# Allegro board senior design v5.brd
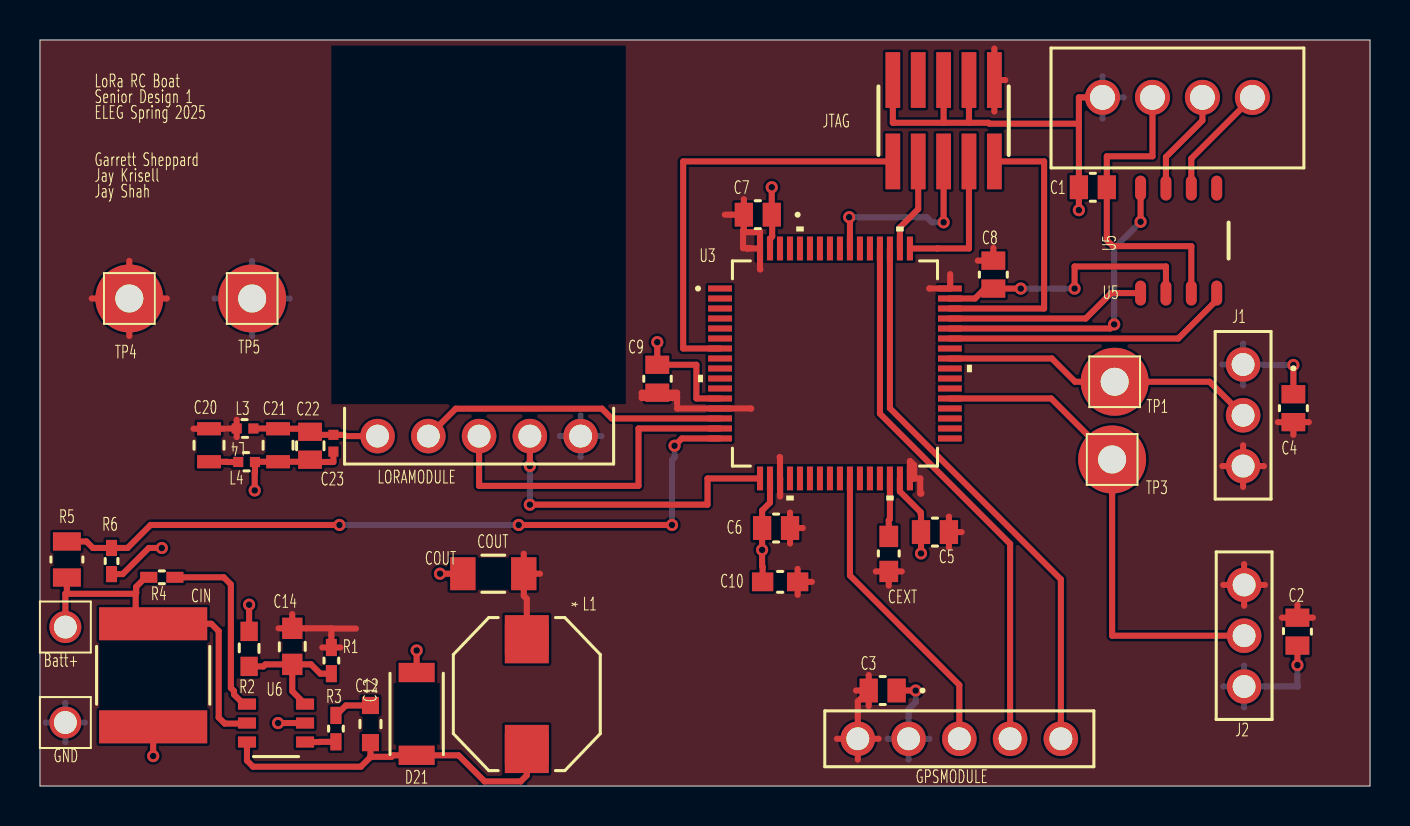
[diagram p0: board, top side]
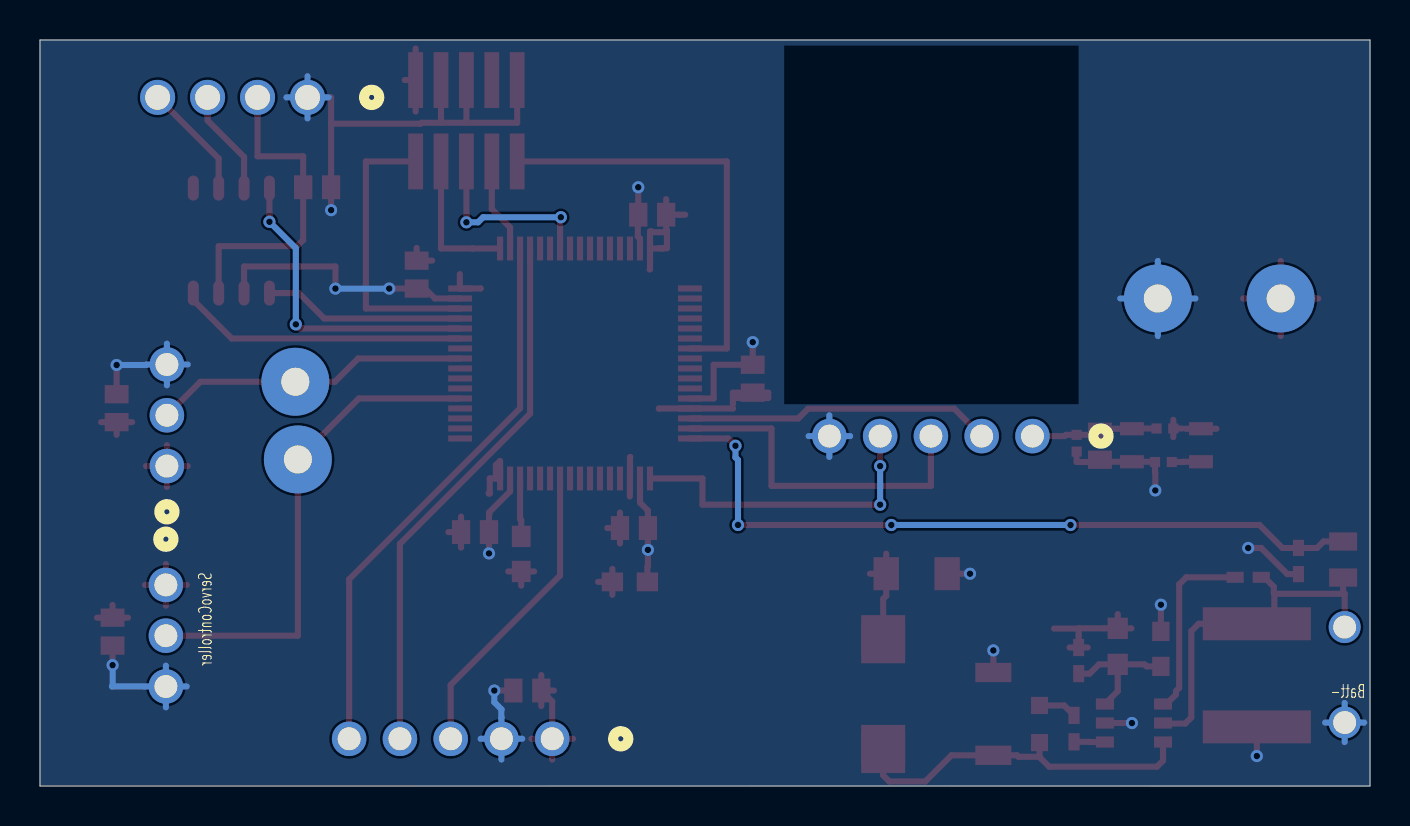
[diagram p1: board, bottom side, seen from below]

Outline 66.55 x 37.31 mm; copper layers: TOP, BOTTOM. Coordinates in mm from the lower left corner of the outline.
Outline path: 0,37.31 0,0 66.55,0 66.55,37.31 0,37.31

## Design rules (mm)
constraint set DEFAULT: min track width 0.305

## Placement (name value [footprint] x y rotation side)
C1  .1uF  [CAP_KGM21_KAV-L]  52.68 29.95 0 top
C2  .1uF  [CAP_KGM21_KAV-L]  62.92 7.72 90 top
C3  .1uF  [CAP_KGM21_KAV-L]  42.16 4.78 180 top
C4  .1uF  [CAP_KGM21_KAV-L]  62.71 18.9 270 top
C5  .1uF  [CAP_KGM21_KAV-L]  44.78 12.7 0 top
C6  .1uF  [CAP_KGM21_KAV-L]  36.83 12.9 0 top
C7  .1uF  [CAP_KGM21_KAV-L]  35.92 28.57 180 top
C8  .1uF  [CAP_KGM21_KAV-L]  47.7 25.58 90 top
C9  .1uF  [CAP_KGM21_KAV-L]  30.89 20.37 270 top
C10  4.7uF  [CAP_0603_CL10A_1P6XP8_SAM-M]  37.03 10.21 0 top
C12  .1uf  [CAP_CL10_SAM-M]  16.54 3.1 90 top
C14  470pF  [CAP_0603G_AVX-M]  12.62 6.99 270 top
C20  10uF  [G-21_MUR-L]  8.46 17.04 90 top
C21  10uF  [G-21_MUR-L]  11.91 17.04 90 top
C22  .1uF  [CAP_KGM21_KAV-L]  13.51 17.02 90 top
C23  47pF  [CAP_GJM1555C1H220JB01__MUR-L]  14.68 17.14 90 top
CANHEADER  CONN_B4B-XH-A  [CONN_B4B-XH-A_JST]  53.16 34.44 180 top
CEXT  4.7 uF  [CAP_0603_CL10A_1P6XP8_SAM-M]  42.47 11.61 270 top
CIN  10uF  [CAP_NTS_55_2P8T_NIP]  5.66 5.54 90 top
COUT  10uf  [G-31_MUR-M]  22.68 10.62 0 top
D21  DIODE_MFLAT  [M-FLAT_TOS-L]  18.85 3.61 270 top
GND  Battery-  [AMV_CON1]  1.27 3.18 0 top
GPSMODULE  CONN5_1LFBN-RC  [CONN5_1LFBN-RC_SUL]  40.92 2.36 0 top
JTAG  FTSH-105-XX-X-DV  [SAMTEC_FTSH-105-XX-X-DV]  45.21 33.27 180 top
L1  4.7uh  [IND_7045_TDK]  24.36 4.6 270 top
L3  INDUCTOR  [IND_BLM15_0402_MUR-L]  10.26 17.88 180 top
L4  INDUCTOR  [IND_BLM15_0402_MUR-L]  10.34 16.21 180 top
LORAMODULE  CONN5_1LFBN-RC  [CONN5_1LFBN-RC_SUL]  16.89 17.5 0 top
R1  15K  [RC0402N_PAN-M]  14.58 6.27 270 top
R2  4.7K  [RC0603N_YAG-M]  10.46 6.86 90 top
R3  51  [RC0402N_YAG-M]  14.81 2.87 270 top
R4  5.1K  [RC0402N_PAN-M]  6.1 10.44 0 top
R5  30K  [RES_R0805_ROM-M]  1.35 11.33 90 top
R6  10K  [RES_1005_SAM-M]  3.58 11.25 90 top
SPEEDCONTROLLER  CONN_PPTC031  [CONN_PPTC031_SUL]  60.2 16 270 top
STEERINGSERVO  CONN_PPTC031  [CONN_PPTC031_SUL]  60.25 10.06 90 top
TP1  TEST POINT  [AMV_TEST_POINT]  53.77 20.22 0 top
TP3  TEST POINT  [AMV_TEST_POINT]  53.64 16.33 0 top
TP4  TEST POINT  [AMV_TEST_POINT]  4.47 24.38 0 top
TP5  TEST POINT  [AMV_TEST_POINT]  10.62 24.38 0 top
U3  STM32F4XXR2  [LQFP64-10X10MM]  39.78 21.13 0 top
U5  TCAN1042H-Q1D  [D0008A_L]  56.97 27.28 90 top
U6  R1240N001x  [SOT-23-6W_PE-SOT23-6W-0512_NMD]  11.81 3.15 0 top
VIN  Battery+  [AMV_CON1]  1.27 7.95 0 top

## Library data of the parts
C1-C10 C14 C20-C23 CEXT COUT = C: User Part Number: PN; Tolerance: TOL
C12 = C
CANHEADER = B4B-XH-A: User Part Number: PN; Tolerance: TOL
CIN = KTS500B106M55N0T00: User Part Number: PN; Tolerance: TOL
D21 = CMS06TE12L,Q,M: User Part Number: PN; Tolerance: TOL
GND VIN = CON1
GPSMODULE LORAMODULE = PPTC051LFBN-RC: User Part Number: PN; Tolerance: TOL
JTAG = FTSH-105-XX-X-DV
L1 = SLF7045T-4R7M2R0-PF: User Part Number: PN; Tolerance: TOL
L3 L4 = INDUCTOR: User Part Number: PN; Tolerance: TOL
R1-R6 = R: User Part Number: PN; Tolerance: TOL
SPEEDCONTROLLER STEERINGSERVO = PPTC031LFBN-RC: User Part Number: PN; Tolerance: TOL
TP1 TP3-TP5 = TEST POINT
U3 = STM32F446RET6TR: User Part Number: PN; Tolerance: TOL
U5 = TCAN1042HDRQ1: Tolerance: TOL; User Part Number: PN
U6 = R1240N001B-TR-FE_3: User Part Number: PN; Tolerance: TOL

## Footprints (pads in the part's own frame, mm; a bottom-side part is the same pattern mirrored in y, then rotated)
AMV_CON1
  round 1.6 hole 1.143: 1(0,0)
AMV_TEST_POINT
  round 3.4 hole 1.4: 1(0,0)
CAP_0603_CL10A_1P6XP8_SAM-M
  rect 1.067x0.94 smd: 1(-0.876,0) 2(0.876,0)
CAP_0603G_AVX-M
  rect 1.067x1.016 smd: 1(-0.902,0) 2(0.902,0)
CAP_CL10_SAM-M
  rect 0.859x0.851 smd: 1(-0.929,0) 2(0.929,0)
CAP_GJM1555C1H220JB01__MUR-L
  rect 0.508x0.508 smd: 1(-0.419,0) 2(0.419,0)
CAP_KGM21_KAV-L
  rect 0.914x1.194 smd: 1(-0.699,0) 2(0.699,0)
CAP_NTS_55_2P8T_NIP
  rect 1.651x5.41 smd: 1(-2.578,0) 2(2.578,0)
CONN5_1LFBN-RC_SUL
  round 1.727 hole 1.143: 1(0,0) 2(2.54,0) 3(5.08,0) 4(7.62,0) 5(10.16,0)
CONN_B4B-XH-A_JST
  round 1.753 hole 1.245: 1(0,0) 2(-2.5,0) 3(-5,0) 4(-7.5,0)
CONN_PPTC031_SUL
  round 1.727 hole 1.143: 1(0,0) 2(-2.54,0) 3(-5.08,0)
D0008A_L
  oval 1.25x0.55 smd: 1(-2.625,1.905) 2(-2.625,0.635) 3(-2.625,-0.635) 4(-2.625,-1.905) 5(2.625,-1.905) 6(2.625,-0.635) 7(2.625,0.635) 8(2.625,1.905)
G-21_MUR-L
  rect 0.66x1.194 smd: 1(-0.826,0) 2(0.826,0)
G-31_MUR-M
  rect 1.27x1.651 smd: 1(-1.524,0) 2(1.524,0)
IND_7045_TDK
  rect 2x2.2 smd: (-2.95,0) (2.95,0) 1(-2.54,0) 2(2.54,0)
IND_BLM15_0402_MUR-L
  rect 0.508x0.508 smd: 1(-0.419,0) 2(0.419,0)
LQFP64-10X10MM
  rect 1.194x0.305 smd: 1(-5.75,3.75) 2(-5.75,3.25) 3(-5.75,2.75) 4(-5.75,2.25) 5(-5.75,1.75) 6(-5.75,1.25) 7(-5.75,0.75) 8(-5.75,0.25) 9(-5.75,-0.25) 10(-5.75,-0.75) 11(-5.75,-1.25) 12(-5.75,-1.75) 13(-5.75,-2.25) 14(-5.75,-2.75) 15(-5.75,-3.25) 16(-5.75,-3.75) 33(5.75,-3.75) 34(5.75,-3.25) 35(5.75,-2.75) 36(5.75,-2.25) 37(5.75,-1.75) 38(5.75,-1.25) 39(5.75,-0.75) 40(5.75,-0.25) 41(5.75,0.25) 42(5.75,0.75) 43(5.75,1.25) 44(5.75,1.75) 45(5.75,2.25) 46(5.75,2.75) 47(5.75,3.25) 48(5.75,3.75)
  rect 0.305x1.194 smd: 17(-3.75,-5.75) 18(-3.25,-5.75) 19(-2.75,-5.75) 20(-2.25,-5.75) 21(-1.75,-5.75) 22(-1.25,-5.75) 23(-0.75,-5.75) 24(-0.25,-5.75) 25(0.25,-5.75) 26(0.75,-5.75) 27(1.25,-5.75) 28(1.75,-5.75) 29(2.25,-5.75) 30(2.75,-5.75) 31(3.25,-5.75) 32(3.75,-5.75) 49(3.75,5.75) 50(3.25,5.75) 51(2.75,5.75) 52(2.25,5.75) 53(1.75,5.75) 54(1.25,5.75) 55(0.75,5.75) 56(0.25,5.75) 57(-0.25,5.75) 58(-0.75,5.75) 59(-1.25,5.75) 60(-1.75,5.75) 61(-2.25,5.75) 62(-2.75,5.75) 63(-3.25,5.75) 64(-3.75,5.75)
M-FLAT_TOS-L
  rect 0.965x1.803 smd: 1(-2.07,0) 2(2.07,0)
RC0402N_PAN-M
  rect 0.859x0.551 smd: 1(-0.654,0) 2(0.654,0)
RC0402N_YAG-M
  rect 0.864x0.559 smd: 1(-0.66,0) 2(0.66,0)
RC0603N_YAG-M
  rect 0.965x0.864 smd: 1(-0.876,0) 2(0.876,0)
RES_1005_SAM-M
  rect 0.809x0.551 smd: 1(-0.654,0) 2(0.654,0)
RES_R0805_ROM-M
  rect 0.914x1.397 smd: 1(-0.902,0) 2(0.902,0)
SAMTEC_FTSH-105-XX-X-DV
  rect 0.74x2.79 smd: 01(-2.54,-2.035) 02(-2.54,2.035) 03(-1.27,-2.035) 04(-1.27,2.035) 05(0,-2.035) 06(0,2.035) 07(1.27,-2.035) 08(1.27,2.035) 09(2.54,-2.035) 10(2.54,2.035)
SOT-23-6W_PE-SOT23-6W-0512_NMD
  rect 0.902x0.559 smd: 1(-1.454,0.95) 2(-1.454,0) 3(-1.454,-0.95) 4(1.454,-0.95) 5(1.454,0) 6(1.454,0.95)

## Nets
3.3V: C2.2 C3.2 C4.2 C5.2 C6.2 C7.2 C8.2 C9.2 C10.2 C14.1 C20.2 CEXT.2 COUT.2 GPSMODULE.1 JTAG.01 L1.1 L3.2 R1.1 SPEEDCONTROLLER.1 STEERINGSERVO.1 TP4.1 U3.13 U3.19 U3.32 U3.48 U3.64
VBAT: U3.1
0: C1.1 C2.1 C3.1 C4.1 C5.1 C6.1 C7.1 C8.1 C9.1 C10.1 C21.1 C22.1 C23.1 CANHEADER.1 CIN.1 COUT.1 D21.1 GND.1 GPSMODULE.2 JTAG.03 JTAG.05 JTAG.09 L4.1 LORAMODULE.5 R2.2 R6.1 SPEEDCONTROLLER.3 STEERINGSERVO.3 TP5.1 U3.12 U3.18 U3.31 U3.47 U3.63 U5.2 U6.5
ADC: R5.2 R6.2 U3.16
PA13 TMS: JTAG.02 U3.46
PA14 TCLK: JTAG.04 U3.49
PA15 TDI: JTAG.08 U3.50
PB3 TBO: JTAG.06 U3.55
RESET: JTAG.10 U3.7
N04277: GPSMODULE.3 U3.26
N04281: GPSMODULE.4 U3.52
N04285: GPSMODULE.5 U3.51
N04355: SPEEDCONTROLLER.2 TP1.1 U3.41
N04395: STEERINGSERVO.2 TP3.1 U3.37
N04429: C21.2 C22.2 C23.2 L3.1 LORAMODULE.1
N04477: LORAMODULE.2 U3.14
N04485: LORAMODULE.3 U3.15
N04755: U3.44 U5.8
N04759: U3.43 U5.4
N04763: U3.45 U5.1
N04855: CANHEADER.4 U5.6
N17576: C14.2 R1.2 R2.1 U6.6
N17942: R3.2 U6.4
N18028: C12.1 D21.2 L1.2 U6.3
N24517: LORAMODULE.4 U3.17
N24691: CANHEADER.3 U5.7
N24886: C1.2 CANHEADER.2 U5.3(VCC)
N27410: C20.1 L4.2
N27791: CEXT.1 U3.30
N061071: C12.2 R3.1
N088060: CIN.2 R4.1 R5.1 U6.2(VIN) VIN.1
N148600: R4.2 U6.1

Pads without a net: JTAG 07; U3 2 3 4 5 6 8 9 10 11 20 21 22 23 24 25 27 28 29 33 34 35 36 38 39 40 42 53 54 56 57 58 59 60 61 62; U5 5

## Via types
v1: diameter 0.61, hole 0.33, TOP to BOTTOM, 27 vias

## Routing (per net, layer and track width the routed paths; a pad name or vN(x,y) marks a point on that pad's centre or on a via; arc(x,y) is an arc through that point)
3.3V: length 79.1
  TOP w0.305: C2.2 62.92,9.06 ; C2.2 62.14,8.42 ; C2.2 63.69,8.42 ; C4.2 63.49,18.2 ; C4.2 62.71,17.56 ; C4.2 61.94,18.2 ; 2.59,24.38 TP4.1 ; TP4.1 4.47,26.26 ; TP4.1 4.47,22.51 ; TP4.1 6.35,24.38 ; C9.2 31.88,19.67 31.88,19.41 ; C9.2 30.89,19.41 ; C9.2 30.11,19.67 30.11,19.41 30.89,19.41 ; 46.93,26.28 C8.2 ; C8.2 47.84,26.28 ; C8.2 47.7,26.91 ; 59.21,10.06 STEERINGSERVO.1 ; STEERINGSERVO.1 60.25,9.02 ; STEERINGSERVO.1 61.29,10.06 ; STEERINGSERVO.1 60.25,11.1 ; COUT.2 24.21,11.62 ; COUT.2 25.02,10.62 ; COUT.2 24.21,9.51 24.36,9.36 L1.1 ; CEXT.2 43.12,10.73 ; CEXT.2 42.47,10.02 ; CEXT.2 41.82,10.73 ; 31.88,19.41 31.88,19.1 ; 31.88,19.41 30.89,19.41 ; 41.47,4 C3.2 ; C3.2 40.92,4.23 GPSMODULE.1 ; C3.2 40.83,4.78 ; C3.2 41.47,5.55 ; GPSMODULE.1 41.96,2.36 ; GPSMODULE.1 40.92,1.32 ; GPSMODULE.1 39.88,2.36 ; 14.58,7.85 14.6,7.87 15.81,7.87 ; 14.58,7.85 14.54,7.89 C14.1 ; 14.58,7.85 R1.1 ; 44.09,14.66 44.09,14.63 44.04,14.63 44.04,15.38 43.74,15.38 ; 37.01,16.46 37.03,16.44 U3.19 37.03,15.38 37.03,14.48 ; C5.2 45.48,13.48 ; C5.2 45.48,11.92 ; C5.2 45.61,12.57 ; C5.2 46.11,12.7 ; U3.64 35.38,26.88 35.38,26.9 ; U3.64 36.03,25.85 36.04,25.83 ; U3.64 36.03,27.74 35.95,27.74 35.95,27.7 35.22,27.7 ; C7.2 35.22,29.35 ; C7.2 34.26,28.57 ; C7.2 35.22,27.8 35.18,27.8 35.18,26.9 35.38,26.9 ; R1.1 15.03,6.93 ; R1.1 14.13,6.93 ; JTAG.01 48.3,35.31 ; JTAG.01 47.75,36.88 ; JTAG.01 47.75,33.74 ; 43.74,15.38 43.74,16.05 43.62,16.17 ; 43.74,15.38 U3.32 43.53,16.25 43.53,16.25 ; L3.2 9.84,18.31 ; L3.2 9.41,17.88 ; L3.2 9.84,17.45 ; 35.38,26.9 35.59,26.9 ; C14.1 11.94,7.89 ; C14.1 12.62,8.6 ; C6.2 37.53,13.68 ; C6.2 38.16,12.9 ; C6.2 37.53,12.13 ; C10.2 38.62,10.21 ; C10.2 37.91,10.86 ; C10.2 37.91,9.56 ; SPEEDCONTROLLER.1 60.2,17.04 ; SPEEDCONTROLLER.1 60.2,14.96 ; SPEEDCONTROLLER.1 61.24,16 ; SPEEDCONTROLLER.1 59.16,16 ; 45.54,25.6 45.54,24.88 U3.48 44.5,24.88 44.5,24.89 ; 35.59,18.87 35.57,18.88 U3.13 31.88,18.88 31.88,18.9 ; 7.68,17.87 C20.2 ; C20.2 8.46,17.88 ; C20.2 9.23,17.87
0: length 111.6
  TOP w0.305: C10.1 36.16,10.96 36.13,10.99 v1(36.13,11.81) C6.1 36.13,13.78 36.53,14.17 U3.18 ; JTAG.05 45.21,33.17 ; 45.21,33.17 42.67,33.17 JTAG.09 ; 45.21,33.17 46.48,33.17 ; v1(30.89,22.2) C9.1 32.84,21.07 32.84,19.38 U3.12 ; 46.48,33.17 47.45,33.17 47.5,33.13 51.98,33.13 ; 46.48,33.17 JTAG.03 ; v1(51.98,28.8) C1.1 51.98,33.13 ; CANHEADER.1 51.98,34.44 51.98,33.13 ; C23.1 14.68,16.21 13.63,16.21 C22.1 13.51,16.22 C21.1 10.77,16.22 L4.1 10.76,15.67 10.74,15.67 v1(10.74,14.78) ; v1(36.61,29.95) C7.1 36.64,28.55 36.64,27.48 36.53,27.37 U3.63 ; R2.2 v1(10.46,9.07) ; U6.5 v1(11.91,3.15) ; CIN.1 v1(5.66,1.5) ; COUT.1 v1(20.02,10.62) ; U3.47 46.79,24.38 47.28,24.88 C8.1 v1(49.07,24.88) ; U5.2 56.34,25.98 51.77,25.98 v1(51.77,24.88) ; U3.31 43.03,14.73 44.07,13.69 44.07,13.59 44.08,13.58 C5.1 v1(44.08,11.63) ; C2.1 v1(62.92,6.05) ; v1(6.1,11.9) 5.44,11.9 4.14,10.6 R6.1 ; D21.1 v1(18.85,6.78) ; C3.1 v1(43.81,4.78) ; C4.1 v1(62.71,21.06)
  BOTTOM w0.305: 52.11,34.44 CANHEADER.1 ; CANHEADER.1 54.22,34.44 ; CANHEADER.1 53.16,35.5 ; CANHEADER.1 53.16,33.39 ; GPSMODULE.2 43.46,3.84 43.81,4.19 v1(43.81,4.78) ; GPSMODULE.2 42.42,2.36 ; GPSMODULE.2 43.46,1.32 ; GPSMODULE.2 44.5,2.36 ; 10.62,22.51 TP5.1 ; TP5.1 10.62,26.26 ; TP5.1 12.5,24.38 ; TP5.1 8.74,24.38 ; LORAMODULE.5 28.09,17.5 ; LORAMODULE.5 26.01,17.5 ; LORAMODULE.5 27.05,16.46 ; LORAMODULE.5 27.05,18.54 ; STEERINGSERVO.3 62.94,4.98 62.92,5 v1(62.92,6.05) ; STEERINGSERVO.3 60.25,6.02 ; STEERINGSERVO.3 59.21,4.98 ; STEERINGSERVO.3 60.25,3.94 ; v1(62.71,21.06) 61.24,21.06 ; GND.1 1.27,4.15 ; GND.1 0.29,3.18 ; GND.1 1.27,2.2 ; GND.1 2.25,3.18 ; 59.16,21.08 SPEEDCONTROLLER.3 ; SPEEDCONTROLLER.3 61.24,21.08 ; SPEEDCONTROLLER.3 60.2,20.04 ; SPEEDCONTROLLER.3 60.2,22.12 ; v1(49.07,24.88) v1(51.77,24.88) ; 20.04,10.62 v1(20.02,10.62)
ADC: length 37.3
  TOP w0.305: U3.16 32.11,17.38 v1(31.75,17.02) ; v1(14.99,13.06) 5.53,13.06 4.38,11.91 R6.2 2.65,11.91 2.32,12.23 R5.2 ; v1(23.95,13.06) v1(31.62,13.06)
  BOTTOM w0.305: v1(31.62,13.06) 31.62,16.31 31.75,16.43 v1(31.75,17.02) ; v1(14.99,13.06) v1(23.95,13.06)
PA13 TMS: length 14.6
  TOP w0.305: JTAG.02 50.24,31.24 50.24,23.88 U3.46
PA14 TCLK: length 7.3
  TOP w0.305: JTAG.04 46.48,26.89 44.91,26.89 44.91,26.88 U3.49
PA15 TDI: length 4.7
  TOP w0.305: U3.50 43.03,27.94 43.94,28.85 JTAG.08
PB3 TBO: length 9.5
  TOP w0.305: U3.55 40.53,28.45 v1(40.49,28.45) ; v1(45.21,28.19) JTAG.06
  BOTTOM w0.305: v1(45.21,28.19) 44.63,28.19 44.37,28.45 v1(40.49,28.45)
RESET: length 21.7
  TOP w0.305: JTAG.10 32.18,31.24 32.18,21.88 U3.7
N04277: length 15.3
  TOP w0.305: U3.26 40.53,10.53 46,5.05 GPSMODULE.3
N04281: length 27.2
  TOP w0.305: U3.52 42.03,18.62 48.54,12.11 GPSMODULE.4
N04285: length 28.1
  TOP w0.305: U3.51 42.53,18.89 51.08,10.34 GPSMODULE.5
N04355: length 15.8
  TOP w0.305: SPEEDCONTROLLER.2 58.52,20.22 TP1.1 51.79,20.22 50.63,21.38 U3.41
N04395: length 24.8
  TOP w0.305: STEERINGSERVO.2 53.64,7.52 TP3.1 50.59,19.38 U3.37
N04429: length 6.5
  TOP w0.305: L3.1 11.91,17.88 C21.2 13.51,17.87 C22.2 13.67,17.56 C23.2 15.21,17.56 15.28,17.5 LORAMODULE.1
N04477: length 15.4
  TOP w0.305: LORAMODULE.2 20.8,18.87 28.12,18.87 28.61,18.38 U3.14
N04485: length 17.4
  TOP w0.305: LORAMODULE.3 21.97,15.01 29.95,15.01 29.95,17.88 U3.15
N04755: length 15.7
  TOP w0.305: v1(53.75,23.09) 53.54,22.88 U3.44 ; U5.8 v1(55.07,28.22)
  BOTTOM w0.305: v1(55.07,28.22) 53.75,26.9 v1(53.75,23.09)
N04759: length 14.5
  TOP w0.305: U5.4 58.88,24.3 56.96,22.38 U3.43
N04763: length 10.1
  TOP w0.305: U5.1 53.6,24.65 52.33,23.38 U3.45
N04855: length 5.8
  TOP w0.305: CANHEADER.4 57.61,31.39 U5.6
N17576: length 6.6
  TOP w0.305: C14.2 11.28,6.08 11.18,5.98 R2.1 ; C14.2 13.56,6.08 14.02,5.62 R1.2 ; C14.2 12.62,4.74 U6.6
N17942: length 1.5
  TOP w0.305: R3.2 14.01,2.21 14,2.2 U6.4
N18028: length 18.2
  TOP w0.305: C12.1 16.54,1.46 ; 16.54,1.46 16.51,1.44 16.51,1.42 16.05,0.97 10.66,0.97 10.36,1.27 U6.3 ; 16.54,1.46 17.59,1.46 17.67,1.54 D21.2 20.94,1.54 22.25,0.23 24.05,0.23 24.36,0.53 L1.2
N24517: length 16.3
  TOP w0.305: U3.17 33.4,15.38 33.4,14.07 v1(24.51,14.07) ; LORAMODULE.4 v1(24.51,16)
  BOTTOM w0.305: v1(24.51,16) v1(24.51,14.07)
N24691: length 5.3
  TOP w0.305: CANHEADER.3 58.16,33.29 56.34,31.46 U5.7
N24886: length 16.1
  TOP w0.305: CANHEADER.2 55.66,31.5 53.38,31.5 C1.2 53.38,27.3 53.68,27 57.61,27 U5.3
N27410: length 1.5
  TOP w0.305: C20.1 9.33,16.22 9.35,16.21 L4.2
N27791: length 2.9
  TOP w0.305: U3.30 42.53,13.35 42.47,13.3 CEXT.1
N061071: length 1.9
  TOP w0.305: R3.1 15.31,4.03 C12.2
N088060: length 18.7
  TOP w0.305: 4.79,9.63 4.81,9.65 4.81,9.97 5.29,10.44 R4.1 ; 4.79,9.63 4.78,9.61 1.27,9.61 ; 4.79,9.63 4.79,8.42 5.09,8.12 CIN.2 8.57,8.12 8.94,7.75 8.94,3.43 9.25,3.12 10.33,3.12 U6.2 ; R5.1 1.35,9.69 1.27,9.61 ; 1.27,9.61 VIN.1
N148600: length 9.4
  TOP w0.305: R4.2 9.19,10.44 9.55,10.08 9.55,4.91 9.71,4.75 9.71,4.58 10.19,4.1 U6.1

## Copper pours and planes (outline as drawn; the poured copper is in the pictures)
3.3V on TOP: 66.57,0 0,0 0,37.31 66.55,37.31 66.55,0.03 ; 1 cut-out
0 on BOTTOM: 0,37.31 66.55,37.31 66.55,0.04 0,-0.03 ; 1 cut-out

## Text on the board
Ref Des/Silkscreen Bottom: Batt- | ServoController
Ref Des/Silkscreen Top: Batt+ | LoRa RC Boat | Senior Design 1 | ELEG Spring 2025 | Garrett Sheppard | Jay Krisell | Jay Shah | TP4 | CIN | TP5 | JTAG | TP3 | TP1 | J1 | J2 | R6 | R4 | C20 | L4 | L3 | R2 | C21 | U6 | C14 | C22 | C23 | R3 | R1 | C12 | LORAMODULE | D21 | COUT | L1 | C9 | U3 | C10 | C6 | C7 | C3 | CEXT | C5 | GPSMODULE | C8 | C1 | U5 | C4 | C2 | *
DEVICE_TYPE_TOP: Battery+
